# Altium PCB Cabinet_Device.PcbDoc (part 4 of 4)
Units mil, origin at the board's own origin, x right, y up, seen from the top; angles counter-clockwise.
Board outline 17790 x 10695 mil, 4 copper layers (Top Layer, Ground, Internal Plane 1, Bottom Layer), stack 30.634 mil thick; 515 components, 346 nets, 1467 pads, 176 vias.
Unrouted connection lines stored in the file: 677.
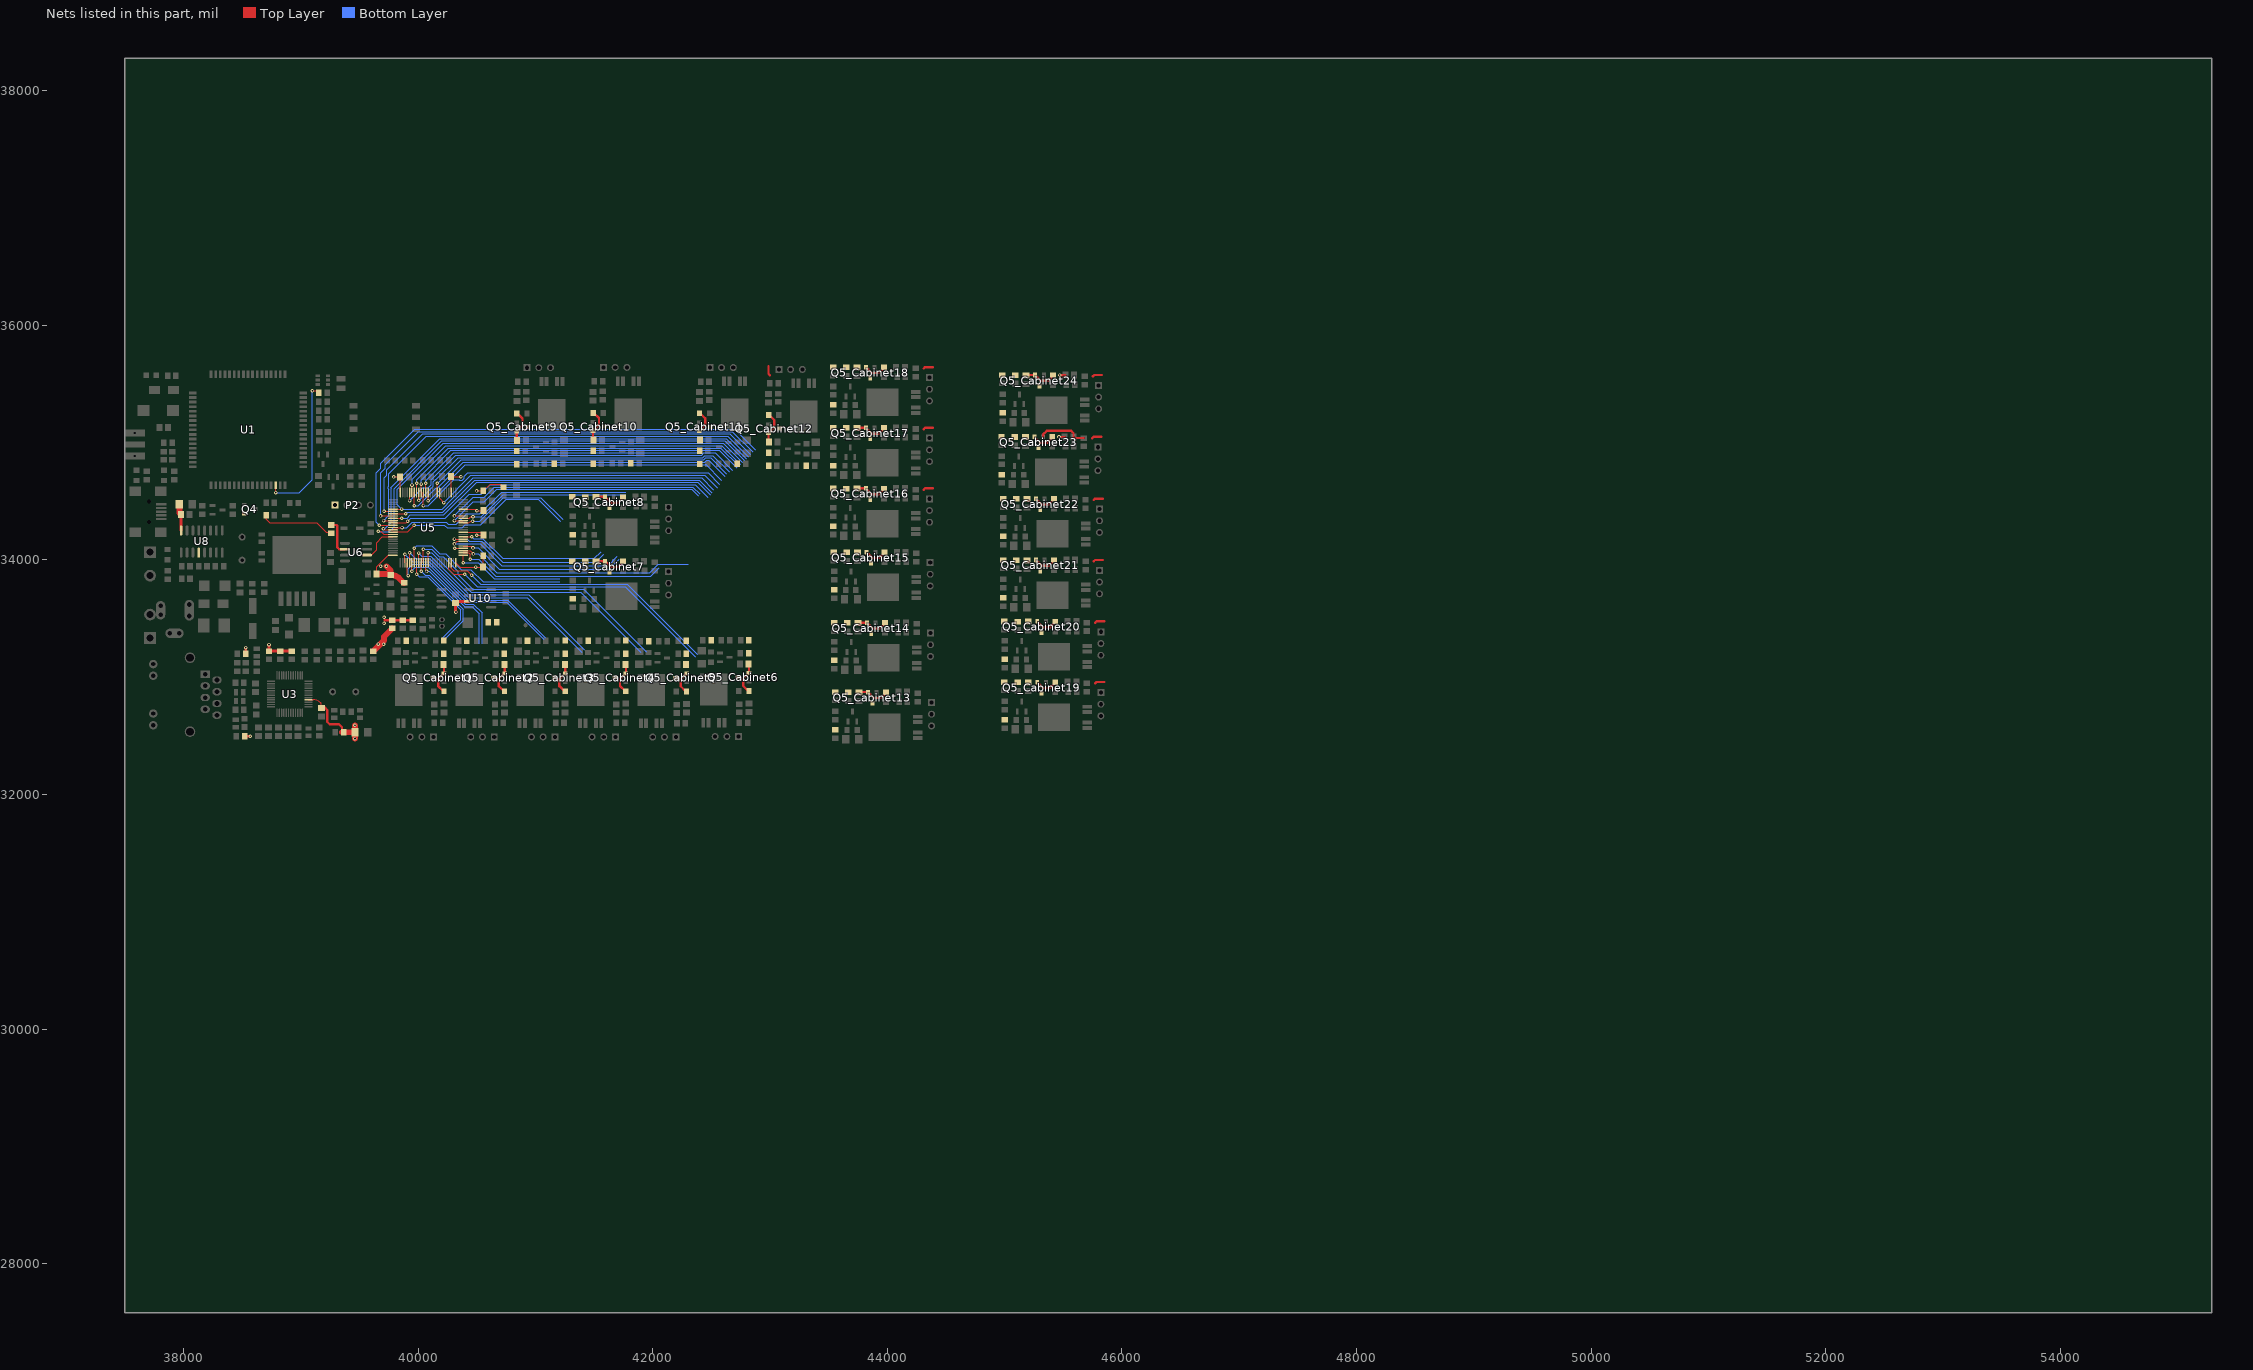
[diagram p6: the nets of this part, all layers, seen from the top]

## Via types
v1: diameter 30, hole 15, Top Layer to Bottom Layer, 176 vias

## Nets (pads, with @x,y where several pads share a name; then routed paths per layer and width w, separated by ;. In a path a pad name is that pad's centre, name@x,y a point inside that pad or via, vN(x,y) a via of type N, cw(c..) or ccw(c..) an arc to the next point about the centre after c; other vN are vias at no path point) (continued)
VDD: C22.1 CP1.1 LR1.2 LR2.2 R17.1 R18.1 R19.1 R20.1 R34.1 R35.1 U3.28 | length 1298.7
  Top Layer w10: U3.28@39064.88,32805.79 39108.18,32805.79 cw(c39108.18,32717.74) 39170.43,32780 cw(c39158.36,32767.93) 39175.43,32767.93 C22.1@39175.43,32747.4
  Top Layer w20: R35.1@38521.79,32496.24 v1(38568.76,32496.24) ; R34.1@38530.87,33200 v1(38530.87,33251.87) ; C22.1@39175,32737.4 39207.6,32737.4 39226,32719 39226,32618 39246,32598 39325,32598 39350.87,32572.13 LR1.2@39350.87,32530
  Top Layer w25: v1(38728.87,33277.13) R19.1@38728.87,33221.67 R18.1@38823.87,33221.67 R17.1@38923.87,33221.67
  Top Layer w50: LR1.2@39350.87,32530 LR1.2@39364.43,32530 CP1.1@39435.32,32530 ; v1(39461.88,32476.12) CP1.1@39461.88,32531 v1(39461.88,32588.88) ; R20.1@39618,33221.43 39711,33314.43 ; 39710.43,33312.43 39710.43,33343.57 ; 39711,33345.57 LR2.2@39780,33414.57
  other v1: 39705.43,33281 39660,33282
VDD3V3: C25.1 C26.1 C27.1 C28.1 C29.1 C30.1 C46.1 LR2.1 LR3.1 LR4.1 LR5.1 LR7.1 P2.1 R36.1 R37.2 R39.1 R44.1 R45.1 U5.11 U5.21 U5.28 U5.50 U5.75 U5.100 U6.2 U10.3 | length 2772.9
  Top Layer w10: C26.1@39647.4,33880 39647.4,33939.4 39746.78,34038.78 U5.75@39785.79,34038.78 ; v1(39792,34706) C28.1@39847.6,34706 39848.78,34704.82 U5.50@39848.78,34574.21 ; U5.28@40281.85,34574.21 40281.85,34705.55 C29.1@40278.4,34709 40279.4,34708 v1(40365,34708) ; U5.100@40321.22,33975.79 40359.01,33938 v1(40491,33938) C27.1@40554.6,33938 40553.57,33939.03 R36.1@40553.57,34034 ; U5.11@40384.21,34235.63 40530.97,34235.63 C25.1@40556.6,34210 v1(40500,34210) ; U5.21@40384.21,34432.48 40487.52,34432.48 v1(40501,34419) C30.1@40555.6,34419 ; v1(40498,34587) LR5.1@40554.57,34587 40613.57,34646 40699.43,34646 R37.2@40728,34617.43
  Top Layer w20: LR7.1@39261,34296.43 39303.57,34296.43 39312,34288 39312,34105 39327,34090 U6.2@39375.51,34090 ; 39715,33485 cw(c39716.05,33483.95) 39716.05,33485.43 LR2.1@39780,33485.43 R45.1@39870,33485.43 R44.1@39955,33485.43
  Top Layer w25: v1(40322,33554) 40320,33556 C46.1@40320,33630.6 40335.4,33646 U10.3@40434.51,33646
  Top Layer w50: C26.1@39647.4,33880 39741.9,33880 cw(c39741.9,33847.34) LR3.1@39765,33870.43 ; v1(39730,33945) 39765,33910 LR3.1@39765,33870.43 ; R39.1@39880,33800.43 39839.29,33841.14 ccw(c39768.58,33770.43) 39768.58,33870.43 LR3.1@39765,33870.43
  other v1: 39710,33460 39710,33510 39680,33945
VDD_D: C38.1 CP4.1 LR7.2 Q4.2 R46.2 U8.4 U8.16 | length 869.3
  Top Layer w10: R46.2@38704.57,34380 38704.57,34347.43 38737,34315 39135,34315 39216,34234 39252.57,34234 LR7.2@39261,34225.57
  Top Layer w25: C38.1@37964.88,34397.72 C38.1@37977.6,34385 37980,34382.6 U8.16@37980,34250.49
  Top Layer w50: C38.1@37964.88,34397.72 CP4.1@37964.88,34474
VDD_EXT_2.8V: R7.1 U1.15 | length 1240.5
  Top Layer w10: v1(38786.22,34573.22) U1.15@38786.22,34635.47 ; v1(39099,35441) 39137.57,35441 R7.1@39154.57,35424
  Bottom Layer w10: v1(38786.22,34573.22) 38988.22,34573.22 39099,34684 v1(39099,35441)
VDOOR: C47_Cabinet1.1 C47_Cabinet2.1 C47_Cabinet3.1 C47_Cabinet4.1 C47_Cabinet5.1 C47_Cabinet6.1 C47_Cabinet7.1 C47_Cabinet8.1 C47_Cabinet9.1 C47_Cabinet10.1 C47_Cabinet11.1 C47_Cabinet12.1 C47_Cabinet13.1 C47_Cabinet14.1 C47_Cabinet15.1 C47_Cabinet16.1 C47_Cabinet17.1 C47_Cabinet18.1 C47_Cabinet19.1 C47_Cabinet20.1 C47_Cabinet21.1 C47_Cabinet22.1 C47_Cabinet23.1 C47_Cabinet24.1 LED5_Cabinet1.1 LED5_Cabinet2.1 LED5_Cabinet3.1 LED5_Cabinet4.1 LED5_Cabinet5.1 LED5_Cabinet6.1 LED5_Cabinet7.1 LED5_Cabinet8.1 LED5_Cabinet9.1 LED5_Cabinet10.1 LED5_Cabinet11.1 LED5_Cabinet12.1 LED5_Cabinet13.1 LED5_Cabinet14.1 LED5_Cabinet15.1 LED5_Cabinet16.1 LED5_Cabinet17.1 LED5_Cabinet18.1 LED5_Cabinet19.1 LED5_Cabinet20.1 LED5_Cabinet21.1 LED5_Cabinet22.1 LED5_Cabinet23.1 LED5_Cabinet24.1 LR4.2 Q5_Cabinet1.2 Q5_Cabinet2.2 Q5_Cabinet3.2 Q5_Cabinet4.2 Q5_Cabinet5.2 Q5_Cabinet6.2 Q5_Cabinet7.2 Q5_Cabinet8.2 Q5_Cabinet9.2 Q5_Cabinet10.2 Q5_Cabinet11.2 Q5_Cabinet12.2 Q5_Cabinet13.2 Q5_Cabinet14.2 Q5_Cabinet15.2 Q5_Cabinet16.2 Q5_Cabinet17.2 Q5_Cabinet18.2 Q5_Cabinet19.2 Q5_Cabinet20.2 Q5_Cabinet21.2 Q5_Cabinet22.2 Q5_Cabinet23.2 Q5_Cabinet24.2 | length 6788.2
  Top Layer w20: C47_Cabinet1.1@40208.84,33109 40220.68,33097.16 Q5_Cabinet1.2@40220.68,33032.4 40170.43,32982.16 40170.43,32923 40214.43,32879 LED5_Cabinet1.1@40219.94,32879 ; C47_Cabinet2.1@40725.84,33109 40737.68,33097.16 Q5_Cabinet2.2@40737.68,33032.4 40687.43,32982.16 40687.43,32923 40731.43,32879 LED5_Cabinet2.1@40736.94,32879 ; LED5_Cabinet9.1@40841.06,35248.51 40846.57,35248.51 40890.57,35204.51 40890.57,35145.35 Q5_Cabinet9.2@40840.32,35095.11 40840.32,35030.35 C47_Cabinet9.1@40852.16,35018.51 ; C47_Cabinet3.1@41242.84,33109 41254.68,33097.16 Q5_Cabinet3.2@41254.68,33032.4 41204.43,32982.16 41204.43,32923 41248.43,32879 LED5_Cabinet3.1@41253.94,32879 ; LED5_Cabinet10.1@41492.06,35251.51 41497.57,35251.51 41541.57,35207.51 41541.57,35148.35 Q5_Cabinet10.2@41491.32,35098.11 41491.32,35033.35 C47_Cabinet10.1@41503.16,35021.51 ; C47_Cabinet7.1@41516.51,33976.84 41528.35,33988.68 Q5_Cabinet7.2@41593.11,33988.68 41643.35,33938.43 41702.51,33938.43 41746.51,33982.43 LED5_Cabinet7.1@41746.51,33987.94 ; C47_Cabinet8.1@41516.51,34524.84 41528.35,34536.68 Q5_Cabinet8.2@41593.11,34536.68 41643.35,34486.43 41702.51,34486.43 41746.51,34530.43 LED5_Cabinet8.1@41746.51,34535.94 ; C47_Cabinet4.1@41759.84,33109 41771.68,33097.16 Q5_Cabinet4.2@41771.68,33032.4 41721.43,32982.16 41721.43,32923 41765.43,32879 LED5_Cabinet4.1@41770.94,32879 ; LED5_Cabinet5.1@42287.94,32877.49 42282.43,32877.49 42238.43,32921.49 42238.43,32980.65 Q5_Cabinet5.2@42288.68,33030.89 ; Q5_Cabinet11.2@42398.32,35096.11 42448.57,35146.35 42448.57,35205.51 42404.57,35249.51 LED5_Cabinet11.1@42399.06,35249.51 ; C47_Cabinet6.1@42808.84,33112.49 42820.68,33100.65 Q5_Cabinet6.2@42820.68,33035.89 42770.43,32985.65 42770.43,32926.49 42814.43,32882.49 LED5_Cabinet6.1@42819.94,32882.49 ; 42987.32,35650.11 42987.32,35585.35 42999.16,35573.51 ; LED5_Cabinet12.1@42988.06,35233.51 42993.57,35233.51 43037.57,35189.51 43037.57,35130.35 Q5_Cabinet12.2@42987.32,35080.11 42987.32,35015.35 C47_Cabinet12.1@42999.16,35003.51 ; C47_Cabinet16.1@43740.51,34596.84 43752.35,34608.68 Q5_Cabinet16.2@43817.11,34608.68 43867.35,34558.43 43926.51,34558.43 43970.51,34602.43 LED5_Cabinet16.1@43970.51,34607.94 ; C47_Cabinet17.1@43740.51,35113.84 43752.35,35125.68 Q5_Cabinet17.2@43817.11,35125.68 43867.35,35075.43 43926.51,35075.43 43970.51,35119.43 LED5_Cabinet17.1@43970.51,35124.94 ; C47_Cabinet14.1@43749,33452.84 43760.84,33464.68 Q5_Cabinet14.2@43825.6,33464.68 43875.84,33414.43 43935,33414.43 43979,33458.43 LED5_Cabinet14.1@43979,33463.94 ; C47_Cabinet13.1@43758.02,32860.6 43769.87,32872.44 Q5_Cabinet13.2@43834.62,32872.44 43884.87,32822.2 43944.02,32822.2 43988.02,32866.2 LED5_Cabinet13.1@43988.02,32871.7 ; Q5_Cabinet18.2@43817.11,35642.68 43867.35,35592.43 43926.51,35592.43 43970.51,35636.43 LED5_Cabinet18.1@43970.51,35641.94 ; Q5_Cabinet15.2@43823.11,34065.68 43873.35,34015.43 43932.51,34015.43 43976.51,34059.43 LED5_Cabinet15.1@43976.51,34064.94 ; 44310.51,34596.84 44322.35,34608.68 44387.11,34608.68 ; 44310.51,35113.84 44322.35,35125.68 44387.11,35125.68 ; 44310.51,35630.84 44322.35,35642.68 44387.11,35642.68 ; C47_Cabinet24.1@45182.51,35563.84 45194.35,35575.68 Q5_Cabinet24.2@45259.11,35575.68 45309.35,35525.43 45368.51,35525.43 45412.51,35569.43 LED5_Cabinet24.1@45412.51,35574.94 ; Q5_Cabinet23.2@45253.11,35048.68 45303.35,34998.43 45362.51,34998.43 45406.51,35042.43 LED5_Cabinet23.1@45406.51,35047.94 ; Q5_Cabinet22.2@45266.11,34521.68 45316.35,34471.43 45375.51,34471.43 45419.51,34515.43 LED5_Cabinet22.1@45419.51,34520.94 ; Q5_Cabinet21.2@45266.6,33998.68 45316.84,33948.43 45376,33948.43 45420,33992.43 LED5_Cabinet21.1@45420,33997.94 ; Q5_Cabinet19.2@45278.11,32957.68 45328.35,32907.43 45387.51,32907.43 45431.51,32951.43 LED5_Cabinet19.1@45431.51,32956.94 ; Q5_Cabinet20.2@45278.11,33474.68 45328.35,33424.43 45387.51,33424.43 45431.51,33468.43 LED5_Cabinet20.1@45431.51,33473.94 ; 45746.51,35036.84 45758.35,35048.68 45823.11,35048.68 ; 45752.51,35563.84 45764.35,35575.68 45829.11,35575.68 ; 45759.51,34509.84 45771.35,34521.68 45836.11,34521.68 ; 45760,33986.84 45771.84,33998.68 45836.6,33998.68 ; 45771.51,32945.84 45783.35,32957.68 45848.11,32957.68 ; 45771.51,33462.84 45783.35,33474.68 45848.11,33474.68
WDI: U5.67 U6.6 | length 322.9
  Top Layer w10: U6.6@39564.49,34040 39602,34040 39646,34084 39646,34147 39695.26,34196.26 U5.67@39785.79,34196.26
电锁1: R61_Cabinet1.2 R62_Cabinet1.1 U5.81 | length 1111.1
  Top Layer w10: v1(39947.2,33902.2) U5.81@39947.2,33975.79
  Bottom Layer w10: v1(39947.2,33902.2) 39947.2,33908.2 39974,33935 40088,33935 40400,33623 40470.53,33623 40545,33548.53 40545,33286
电锁2: R61_Cabinet2.2 R62_Cabinet2.1 U5.82 | length 1498.8
  Top Layer w10: U5.82@39966.89,33975.79 v1(39966.89,34098.11)
  Bottom Layer w10: v1(39966.89,34098.11) 39986.78,34118 40115,34118 40183,34050 40235,34050 40369,33916 40450.37,33916 40555.37,33811 41208,33811
电锁3: R61_Cabinet3.2 R62_Cabinet3.1 U5.83 | length 911.2
  Top Layer w10: v1(39986.57,33877.57) U5.83@39986.57,33975.79
  Bottom Layer w10: v1(39986.57,33877.57) 40010.15,33854 40083,33854 40362,33575 40362,33489 40202,33329
电锁4: R61_Cabinet4.2 R62_Cabinet4.1 U5.84 | length 1833.1
  Top Layer w10: U5.84@40006.26,33975.79 v1(40006.26,34057.74)
  Bottom Layer w10: v1(40006.26,34057.74) 40033,34031 40109,34031 40437,33703 40943,33703 41415,33231
电锁5: R61_Cabinet5.2 R62_Cabinet5.1 U5.85 | length 902.3
  Top Layer w10: v1(40025.94,33903.06) U5.85@40025.94,33975.79
  Bottom Layer w10: v1(40025.94,33903.06) 40059,33870 40095,33870 40385.33,33579.67 40385.33,33479.33 40218.5,33312.5
电锁6: R61_Cabinet6.2 R62_Cabinet6.1 U5.86 | length 2387.4
  Top Layer w10: U5.86@40045.63,33975.79 v1(40045.63,34089)
  Bottom Layer w10: v1(40045.63,34089) 40115,34089 40180,34024 40216,34024 40341,33899 40341,33873 40465,33749 41410,33749 41943,33216
电锁7: R61_Cabinet7.2 R62_Cabinet7.1 U5.87 | length 930.5
  Top Layer w10: U5.87@40065.32,33975.79 40065.32,33907.68 v1(40072,33901)
  Bottom Layer w10: v1(40072,33901) 40095,33901 40396,33600 40461,33600 40522,33539 40522,33286
电锁8: R61_Cabinet8.2 R62_Cabinet8.1 U5.88 | length 2248.5
  Top Layer w10: U5.88@40085,33975.79 v1(40085,34060)
  Bottom Layer w10: v1(40085,34060) 40117,34060 40454,33723 41387,33723 41898,33212
电锁9: R61_Cabinet9.2 R62_Cabinet9.1 U5.55 | length 6240.2
  Top Layer w10: U5.55@39785.79,34432.48 v1(39860.52,34432.48)
  Bottom Layer w10: 42518,34599 42417,34700 40469,34700 40248,34479 40248,34475.57 40204.91,34432.48 v1(39860.52,34432.48) 39824,34469 39824,34601 40216,34993 42600.38,34993 42763.69,34829.69
电锁10: R61_Cabinet10.2 R62_Cabinet10.1 U5.56 | length 3738.8
  Top Layer w10: v1(39709.8,34412.8) U5.56@39785.79,34412.8
  Bottom Layer w10: v1(39709.8,34412.8) 39709.8,34700.8 39731,34722 39731,34766 40038,35073 42657.56,35073 42832.28,34898.28
电锁11: R61_Cabinet11.2 R62_Cabinet11.1 U5.57 | length 2882.9
  Top Layer w10: U5.57@39785.79,34393.11 v1(39894.11,34393.11)
  Bottom Layer w10: v1(39894.11,34393.11) 39907,34406 40209,34406 40483,34680 42394.9,34680 42504.45,34570.45
电锁12: R61_Cabinet12.2 R62_Cabinet12.1 U5.58 | length 3882.7
  Top Layer w10: v1(39679.57,34373.43) U5.58@39785.79,34373.43
  Bottom Layer w10: v1(39679.57,34373.43) 39679.57,34742.86 39719,34782.28 39719,34810 40002,35093 42679.99,35093 42853.49,34919.49
电锁13: R61_Cabinet13.2 R62_Cabinet13.1 U5.59 | length 2873.9
  Top Layer w10: U5.59@39785.79,34353.74 v1(39860.26,34353.74)
  Bottom Layer w10: v1(39860.26,34353.74) 39860.52,34354 39907,34354 39935,34382 40220,34382 40498,34660 42385.21,34660 42489.6,34555.6
电锁14: R61_Cabinet14.2 R62_Cabinet14.1 U5.60 | length 3767.5
  Top Layer w10: v1(39706.06,34334.06) U5.60@39785.79,34334.06
  Bottom Layer w10: v1(39706.06,34334.06) 39751,34379 39751,34601.72 39747,34605.72 39747,34622.28 39751,34626.28 39751,34734 40070,35053 42637.96,35053 42812.48,34878.48
电锁15: R61_Cabinet15.2 R62_Cabinet15.1 U5.61 | length 2861.6
  Top Layer w10: U5.61@39785.79,34314.37 39788.57,34317.15 39899.15,34317.15 v1(39910,34328)
  Bottom Layer w10: v1(39910,34328) 39936,34354 40232,34354 40438,34560 40537,34560 40617,34640 42364.19,34640 42469.1,34535.1
电锁16: R61_Cabinet16.2 R62_Cabinet16.1 U5.62 | length 4055.4
  Top Layer w10: v1(39669.32,34294.68) U5.62@39785.79,34294.68
  Bottom Layer w10: v1(39669.32,34294.68) 39644,34320 39644,34741 39683,34780 39683,34825 39971,35113 42701,35113 42874,34940
电锁17: R61_Cabinet17.2 R62_Cabinet17.1 U5.39 | length 2541.5
  Top Layer w10: U5.39@40065.32,34574.21 v1(40065.32,34653.32)
  Bottom Layer w10: v1(40065.32,34653.32) 40065.32,34672.32 40305,34912 42409.4,34912
电锁18: R61_Cabinet18.2 R62_Cabinet18.1 U5.40 | length 2799.3
  Top Layer w10: v1(40045.63,34462.63) U5.40@40045.63,34574.21
  Bottom Layer w10: v1(40045.63,34462.63) 40084.63,34462.63 40303,34681 40349.57,34681 40352.57,34678 40377.43,34678 40395,34695.57 40395,34711 40424,34740 42474,34740 42568,34646
电锁19: R61_Cabinet19.2 R62_Cabinet19.1 U5.41 | length 2963.2
  Top Layer w10: U5.41@40025.94,34574.21 v1(40025.94,34645.06)
  Bottom Layer w10: v1(40025.94,34645.06) 40025.94,34678.94 40280,34933 42567.04,34933 42717.02,34783.02
电锁20: R61_Cabinet20.2 R62_Cabinet20.1 U5.42 | length 2952.6
  Top Layer w10: v1(40006.26,34505.74) U5.42@40006.26,34574.21
  Bottom Layer w10: v1(40006.26,34505.74) 40007.74,34505.74 40131,34629 40131,34667 40148.83,34684.83 ; 40151.66,34682 40341.66,34872 42425.97,34872 42442.97,34889 42513,34889 42653,34749
电锁21: R61_Cabinet21.2 R62_Cabinet21.1 U5.43 | length 3030
  Top Layer w10: U5.43@39986.57,34574.21 39986.57,34650.57 v1(39988,34652)
  Bottom Layer w10: v1(39988,34652) 39988,34682 40259,34953 42580.99,34953 42733.99,34799.99
电锁22: R61_Cabinet22.2 R62_Cabinet22.1 U5.44 | length 3027
  Top Layer w10: v1(39966.89,34459.89) U5.44@39966.89,34574.21
  Top Layer w20: v1(45463.51,35047.43) 45512.11,35047.43
  Bottom Layer w10: v1(39966.89,34459.89) 39999.89,34459.89 40150,34610 40164.43,34610 40386.43,34832 42442.54,34832 42459.54,34849 42476,34849 42613,34712
电锁23: R61_Cabinet23.2 R62_Cabinet23.1 U5.45 | length 3129.8
  Top Layer w10: U5.45@39947.2,34574.21 v1@39947.2,34622.2
  Top Layer w20: v1(45469.51,35574.43) 45518.11,35574.43
  Bottom Layer w10: v1(39948,34637) 39948,34685 40236,34973 42589.27,34973 42748.14,34814.14
电锁24: R61_Cabinet24.2 R62_Cabinet24.1 U5.46 | length 3075.9
  Top Layer w10: v1(39927.52,34504.52) U5.46@39927.52,34574.21
  Bottom Layer w10: v1(39927.52,34504.52) 40038,34615 40085,34615 40111,34641 40111,34682 40321,34892 42417.69,34892 42436.69,34911 42532,34911 42680,34763
门磁1: Q5_Cabinet1.3 R60_Cabinet1.2 U5.15 | length 1013.6
  Top Layer w10: U5.15@40384.21,34314.37 40433.37,34314.37 40447,34328 v1(40464,34328)
  Bottom Layer w10: v1(40464,34328) 40524.74,34328 40727.74,34531 41045,34531 41231,34345
门磁2: Q5_Cabinet2.3 R60_Cabinet2.2 U5.16 | length 2283.1
  Top Layer w10: v1(40310.06,34334.06) U5.16@40384.21,34334.06
  Bottom Layer w10: v1(40310.06,34334.06) 40469.63,34493.63 40564,34493.63 40670.37,34600 42333.72,34600 42386.86,34546.86
门磁3: Q5_Cabinet3.3 R60_Cabinet3.2 U5.17 | length 1468.7
  Top Layer w10: U5.17@40384.21,34353.74 40434.74,34353.74 40447,34366 v1(40468,34366)
  Bottom Layer w10: v1(40468,34366) 40537,34366 40725,34554 41770,34554
门磁4: Q5_Cabinet4.3 R60_Cabinet4.2 U5.18 | length 2292.9
  Top Layer w10: v1(40309.43,34373.43) U5.18@40384.21,34373.43
  Bottom Layer w10: v1(40309.43,34373.43) 40469,34533 40564,34533 40651,34620 42342,34620 42401,34561
门磁5: Q5_Cabinet5.3 R60_Cabinet5.2 U5.33 | length 2571.1
  Top Layer w10: U5.33@40183.43,34574.21 40183.43,34522.57 v1(40218,34488)
  Bottom Layer w10: v1(40218,34488) 40450,34720 42444,34720 42549,34615
门磁6: Q5_Cabinet6.3 R60_Cabinet6.2 U5.34 | length 2687.7
  Top Layer w10: U5.34@40163.74,34574.21 40163.74,34651.74 v1(40164,34652)
  Bottom Layer w10: v1(40164,34652) 40166,34652 40366,34852 42434.26,34852 42451.26,34869 42493,34869 42628,34734
门磁7: Q5_Cabinet7.3 R60_Cabinet7.2 U5.63 | length 2124.2
  Top Layer w10: U5.63@39785.79,34275 v1(39863,34275)
  Bottom Layer w10: v1(39863,34275) 39904,34275 39949,34320 40238,34320 40256,34302 40325,34302 40416,34393 40527,34393 40711,34577 41770,34577
门磁8: Q5_Cabinet8.3 R60_Cabinet8.2 U5.64 | length 3744.6
  Top Layer w10: v1(39704,34264) 39709.91,34258.09 39783.01,34258.09 U5.64@39785.79,34255.32
  Bottom Layer w10: v1(39704,34264) 39714,34264 39771,34321 39771,34610 39767,34614 40186,35033 42626.85,35033 42796.93,34862.93
门磁9: Q5_Cabinet9.3 R60_Cabinet9.2 U5.65 | length 1639.2
  Top Layer w10: U5.65@39785.79,34235.63 39788.57,34238.41 39910.41,34238.41 v1(39966,34294)
  Bottom Layer w10: v1(39966,34294) 40225,34294 40247,34272 40375,34272 40401,34298 40536,34298 40753,34515 41025.64,34515 41213.32,34327.32
门磁10: Q5_Cabinet10.3 R60_Cabinet10.2 U5.66 | length 3838.7
  Top Layer w10: v1(39661,34244) 39679.86,34244 39705.14,34218.72 39783.01,34218.72 U5.66@39785.79,34215.94
  Bottom Layer w10: v1(39661,34244) 39667,34238 39751,34238 39795,34282 39795,34606 40202,35013 42615.74,35013 42781.37,34847.37
门磁11: Q5_Cabinet11.3 R60_Cabinet11.2 U5.78 | length 1562.6
  Top Layer w10: U5.78@39888.15,33975.79 v1(39888.15,34047.85)
  Bottom Layer w10: v1(39888.15,34047.85) 39954,33982 40097,33982 40422,33657 40762.46,33657 41083.73,33335.73
门磁12: Q5_Cabinet12.3 R60_Cabinet12.2 U5.79 | length 1605.8
  Top Layer w10: U5.79@39907.83,33975.79 39907.83,33873.17 v1(39916,33865)
  Bottom Layer w10: v1(39916,33865) 39916,33922 39954,33960 40092,33960 40413,33639 40755,33639 41071,33323
门磁13: Q5_Cabinet13.3 R60_Cabinet13.2 U5.80 | length 1905
  Top Layer w10: U5.80@39927.52,33975.79 v1(39927.52,34060.52)
  Bottom Layer w10: v1(39927.52,34060.52) 39979.04,34009 40101,34009 40433,33677 40932.23,33677 41396.62,33212.62
门磁14: Q5_Cabinet14.3 R60_Cabinet14.2 U5.7 | length 1580.4
  Top Layer w10: v1(40310,34135) 40331.89,34156.89 U5.7@40384.21,34156.89
  Bottom Layer w10: v1(40310,34135) 40528,34135 40712,33951 41620.6,33951 41698.6,34029
门磁15: Q5_Cabinet15.3 R60_Cabinet15.2 U5.8 | length 1459.1
  Top Layer w10: v1(40309.57,34176.57) U5.8@40384.21,34176.57
  Bottom Layer w10: v1(40309.57,34176.57) 40419.43,34176.57 40437,34159 40541,34159 40721,33979 41516,33979 41584,34047
门磁16: Q5_Cabinet16.3 R60_Cabinet16.2 U5.9 | length 1276.9
  Top Layer w10: U5.9@40384.21,34196.26 v1(40457.74,34196.26)
  Bottom Layer w10: v1(40457.74,34196.26) 40473,34181 40552,34181 40721,34012 41502.33,34012 41560.67,34070.33
门磁17: Q5_Cabinet17.3 R60_Cabinet17.2 U5.97 | length 2467.1
  Top Layer w10: U5.97@40262.17,33975.79 40262.17,33919.83 40305,33877 v1(40398,33877)
  Bottom Layer w10: v1(40398,33877) 40506,33769 41768,33769 42364,33173
门磁18: Q5_Cabinet18.3 R60_Cabinet18.2 U5.98 | length 2447
  Top Layer w10: U5.98@40281.85,33975.79 40281.85,33929.15 40304,33907 40418,33907 v1(40456,33869)
  Bottom Layer w10: v1(40456,33869) 40534,33791 41784.72,33791 42378.86,33196.86
门磁19: Q5_Cabinet19.3 R60_Cabinet19.2 U5.1 | length 944.4
  Top Layer w10: v1(40384.21,33974.79) U5.1@40384.21,34038.78
  Bottom Layer w10: v1(40384.21,33974.79) 40511.21,33974.79 40648,33838 41208,33838
门磁20: Q5_Cabinet20.3 R60_Cabinet20.2 U5.2 | length 1806.2
  Top Layer w10: U5.2@40384.21,34058.46 40432.54,34058.46 40444,34047 v1(40444,34005)
  Bottom Layer w10: v1(40444,34005) 40519,34005 40663,33861 41985,33861 42055,33931
门磁21: Q5_Cabinet21.3 R60_Cabinet21.2 U5.3 | length 2025.7
  Top Layer w10: U5.3@40384.21,34078.15 40443.85,34078.15 v1(40472,34050)
  Bottom Layer w10: v1(40472,34050) 40512,34050 40671,33891 41975.43,33891 42046.43,33962 42303,33962
门磁22: Q5_Cabinet22.3 R60_Cabinet22.2 U5.4 | length 496.6
  Top Layer w10: v1(40311.83,34097.83) U5.4@40384.21,34097.83
  Top Layer w20: 45327.91,35048.68 45327.91,35066.83 45360.51,35099.43 45566.51,35099.43 45586.91,35079.03 45586.91,35047.43 45596.48,35037.87 45676.51,35037.87
门磁23: Q5_Cabinet23.3 R60_Cabinet23.2 U5.5 | length 1447.4
  Top Layer w10: U5.5@40384.21,34117.52 40451.48,34117.52 v1(40468,34101)
  Bottom Layer w10: v1(40468,34101) 40513,34101 40693,33921 41630,33921 41715,34006
门磁24: Q5_Cabinet24.3 R60_Cabinet24.2 U5.38 | length 2753.4
  Top Layer w10: v1(40085,34503) U5.38@40085,34574.21
  Bottom Layer w10: v1(40085,34503) 40094,34503 40403,34812 42450.82,34812 42451.41,34812.59 42584,34680
pads on no net: J1.3@39395,34979 J1.6 J2.7 J2.8 TP1.1 U1.2 U1.3 U1.5 U1.6 U1.7 U1.8 U1.11 U1.12 U1.13 U1.14 U1.19 U1.20 U1.21 U1.22 U1.23 U1.24 U1.25 U1.27 U1.28 U1.35 U1.36 U1.37 U1.38 U1.40 U1.41 U1.42 U1.43 U1.44 U1.47 U1.48 U1.49 U1.50 U1.51 U1.67 U1.68 U3.7 U3.12 U3.13 U3.18 U3.24 U3.26 U3.46 U3.47 U5.24 U5.53 U5.54 U5.73 U7.3 U7.7 U8.9 U8.10 U8.11 U8.12 U8.15 U10.5 U10.8 U11_Cabinet1.4 U11_Cabinet2.4 U11_Cabinet3.4 U11_Cabinet4.4 U11_Cabinet5.4 U11_Cabinet6.4 U11_Cabinet7.4 U11_Cabinet8.4 U11_Cabinet9.4 U11_Cabinet10.4 U11_Cabinet11.4 U11_Cabinet12.4 U11_Cabinet13.4 U11_Cabinet14.4 U11_Cabinet15.4 U11_Cabinet16.4 U11_Cabinet17.4 U11_Cabinet18.4 U11_Cabinet19.4 U11_Cabinet20.4 U11_Cabinet21.4 U11_Cabinet22.4 U11_Cabinet23.4 U11_Cabinet24.4 US1. US1.4 X1.

## Polygon pours and split planes (outlines as drawn)
GND on Ground (split plane): 55269.9,27600.1 37520.1,27600.1 37520.1,38254.9 55269.9,38254.9
AVDD on Internal Plane 1 (split plane): 38800.4,33044.4 39048.4,32796.4 39048.4,32796.39 39254.4,32590.4 39256.05,32589.29 39258,32588.9 39302.89,32588.9 39313.9,32577.89 39313.9,32494.1 39210.11,32494.1 39169.6,32534.6 39167.95,32535.71 39166,32536.1 38378.11,32536.1 38374.1,32540.11 38374.1,33152.9 38691.89,33152.9
VDD on Internal Plane 1 (split plane): 39740.83,33308.4 39748.34,33300.89 39748.34,32460.11 39739.32,32451.1 38054.1,32451.1 38054.1,33216.89 38146.11,33308.9 39740.49,33308.9
VDD on Internal Plane 1 (split plane): 55269.9,27600.1 37520.1,27600.1 37520.1,38254.9 55269.9,38254.9

## Other copper
Top Layer:
  rectangle net VDD: 39627,33257 39731,33305
  rectangle net AVDD: 39207,32493 39259,32581
  rectangle net VDD3V3: 39654,33924 39749,33974
  rectangle net VCC4V2: 37591,35395 37693,35513
  rectangle net VDD3V3: 39690,33440 39735,33530
  rectangle net VCC4V2: 39565,33335 39675,33430
Internal Plane 1 (plane layer: these items are gaps in the copper):
  lines w10: 39739.43,32444 39753.43,32458 39753.43,33303 39744.43,33312 ; 39740,32446 38049,32446 38049,33219 38144,33314 38790,33314 39745,33314 ; 38369,32538 38376,32531 39166,32531 39208,32489 39319,32489 39319,32580 39305,32594 39258,32594 39052,32800 38804,33048 38694,33158 38369,33158 38369,32538

## Silkscreen, mask and mechanical layers (free items; w line width, h text height)
Mechanical 1:
  lines w10: 55290,27580 37500,27580 37500,38275 55290,38275

## Text inside footprints (layer, text, board x,y; h text height)
J3: Mechanical 1 "Alert PCB fab to slot details" at 37521.26,33808.82 h11.81; Mechanical 1 "Assign keep-out area to slot" at 37521.26,33828.5 h11.81; Mechanical 1 "Mech 1 - Slot cut-out" at 37521.26,33789.13 h11.81; Mechanical 1 "Mech 2 - Clearance, move to internal plane if present" at 37521.26,33769.44 h11.81
US1: Mechanical 2 "PCB Edge" at 37482.98,34568.91 h9.84 r270